# EAGLE board LC Filter (EAGLE 9.6.2)
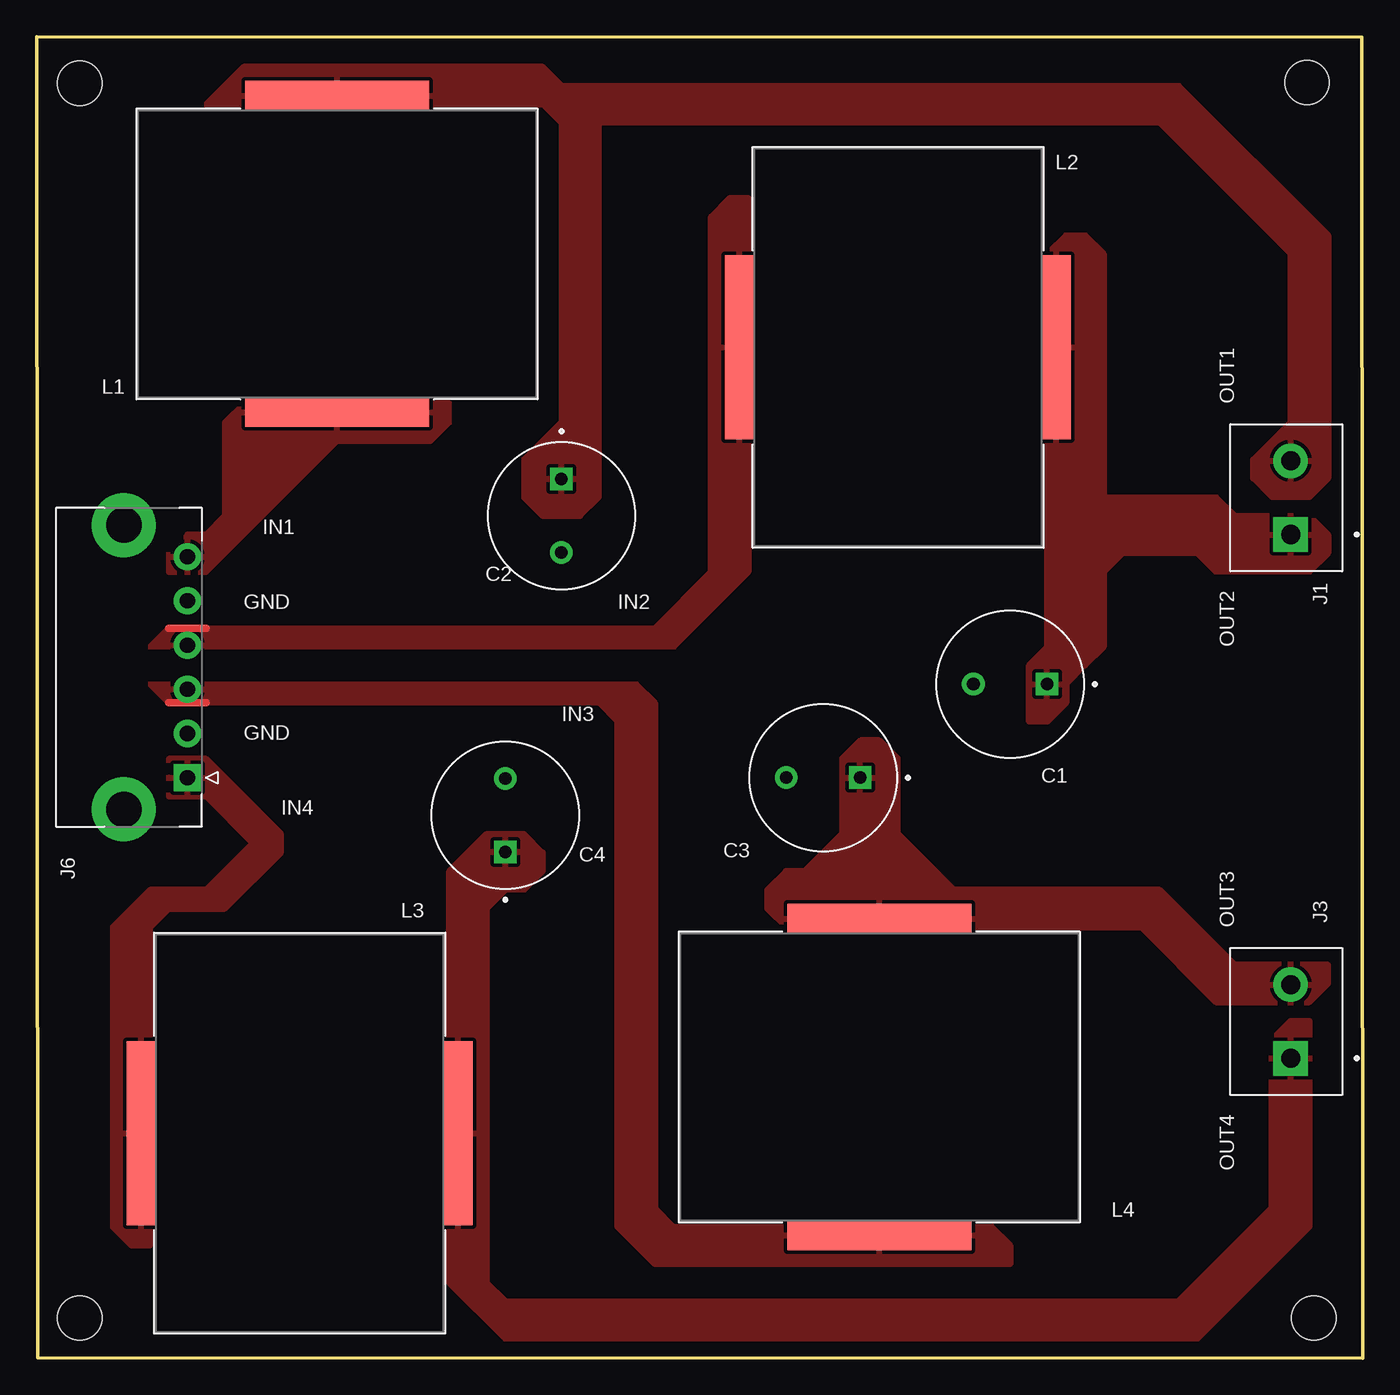
[diagram p0: board, top side]
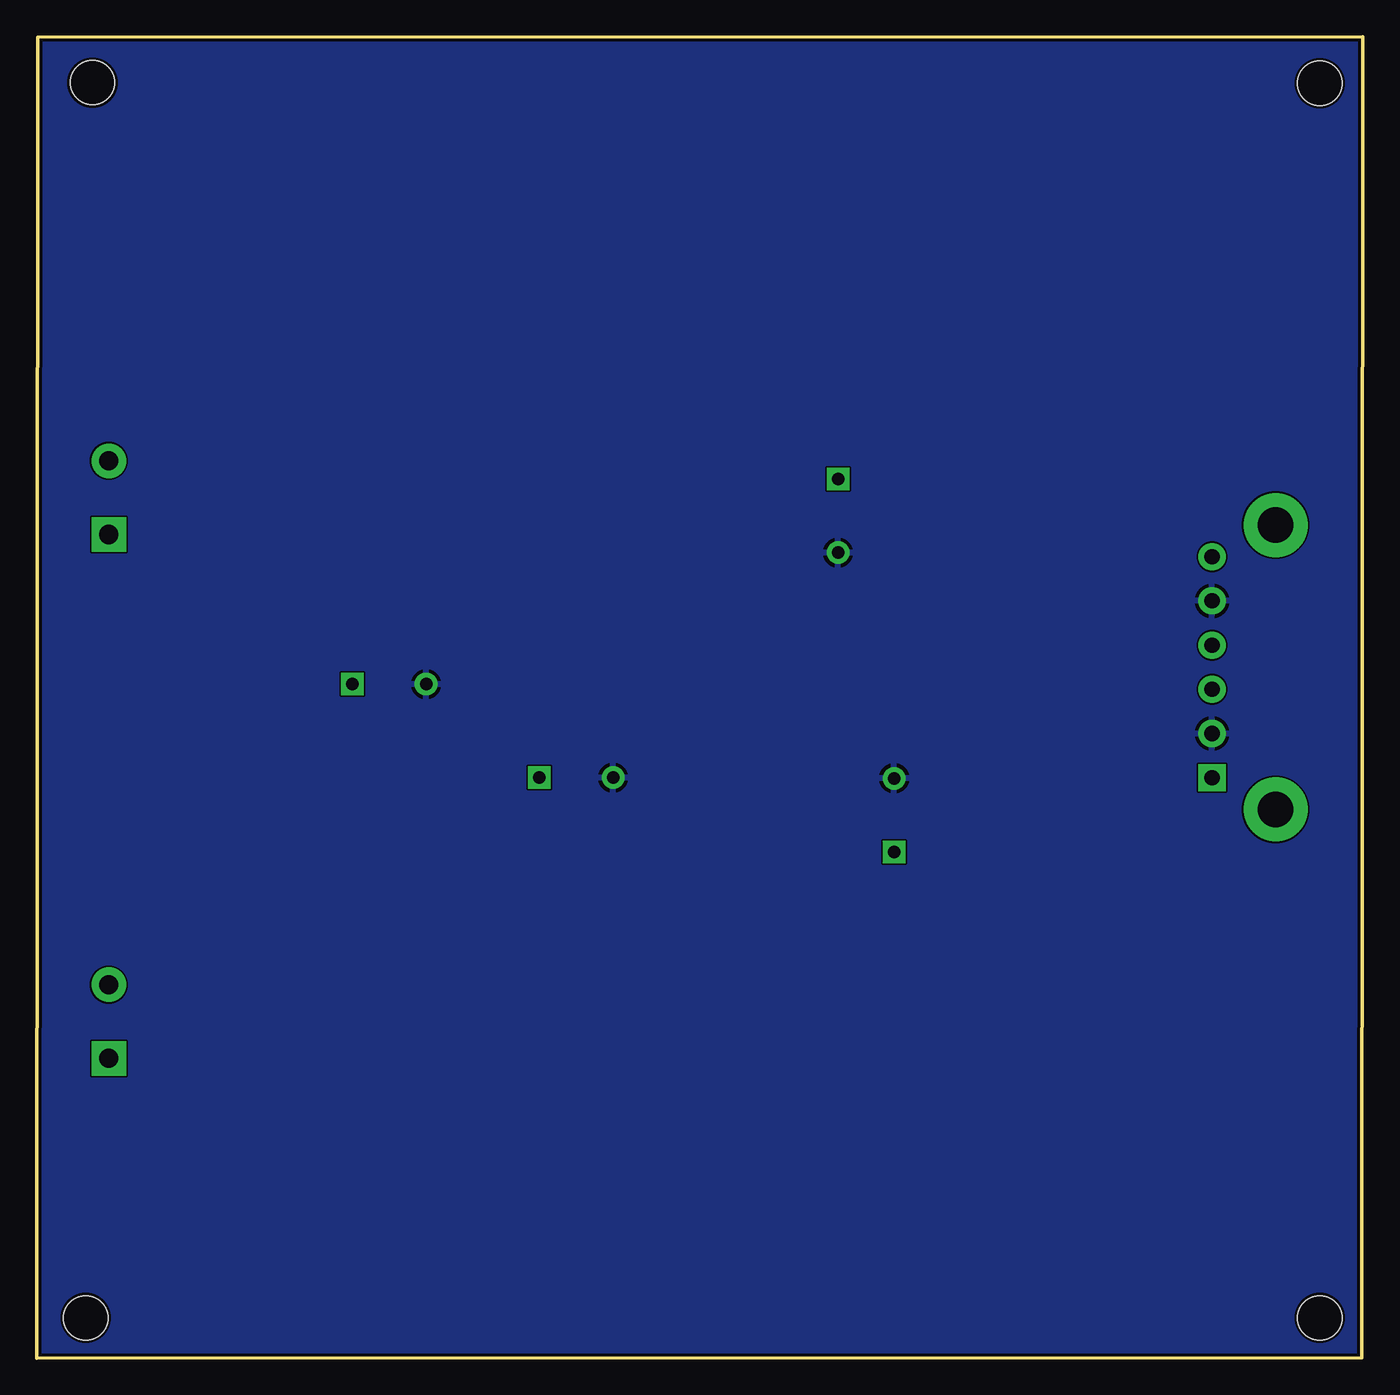
[diagram p1: board, bottom side, seen from below]

Size 90.05 x 89.71 mm. Coordinates in mm from the lower left corner, seen from the top.
Outline: 0,89.71 0.07,0.04 90.05,0 89.98,89.67 0,89.71
Copper layers (1*16): Top 0.035mm / dielectric 1.6mm / Bottom 0.035mm
Design rules "jlcpcb-2layers": minimum track width 5mil, minimum drill 0.3mm, track to track 5mil, track to pad 5mil, pad to pad 5mil, via to via 5mil, smd to smd 5mil, copper to edge 0.2mm, drill to drill 6mil, minimum pad ring 10mil, minimum via ring 3mil, stop-mask expansion 4mil, vias tented up to drill 0mil, thermal gap 10mil
Holes 3 mm at 2.91,86.55 86.27,86.6 2.91,2.73 86.73,2.73

## Footprints (pad centres in the part's own frame; a part is rotated, then mirrored left to right if it is on the bottom)
CAPPRD500W60D1000H1250 = drill 0.85 pad 1.2: N 2.5,0 | drill 0.85 pad 1.2 square: P -2.5,0
CUI_TB002-500-02BE = drill 1.3 square: 1 0,0 | drill 1.3: 2 5,0
MOLEX_436500603 = drill 1.02 pad 1.52 square: 1 0,0 | drill 1.02 pad 1.52: 2 -3,0; 3 -6,0; 4 -9,0; 5 -12,0; 6 -15,0 | drill 2.41 pad 2.91: S1 2.15,-4.32; S2 -17.15,-4.32
6000B_SERIES_MUR = smd 1.994 x 12.497: 1 -10.751,0; 2 10.751,0

## Placement (x,y rotation side)
C1  ECA1EHG471E  [CAPPRD500W60D1000H1250]  66.11,45.76 180 top
C2  ECA1EHG471E  [CAPPRD500W60D1000H1250]  35.63,57.19 270 top
C3  ECA1EHG471E  [CAPPRD500W60D1000H1250]  53.41,39.41 180 top
C4  ECA1EHG471E  [CAPPRD500W60D1000H1250]  31.82,36.87 90 top
J1  TB002-500-02BE  [CUI_TB002-500-02BE]  85.16,55.92 90 top
J3  TB002-500-02BE  [CUI_TB002-500-02BE]  85.16,20.36 90 top
J6  436500603  [MOLEX_436500603]  10.23,39.41 270 top
L1  60B104C  [6000B_SERIES_MUR]  20.39,74.97 90 top
L2  60B104C  [6000B_SERIES_MUR]  58.49,68.62 0 top
L3  60B104C  [6000B_SERIES_MUR]  17.85,15.28 0 top
L4  60B104C  [6000B_SERIES_MUR]  57.22,19.09 90 top

## Library data of the parts
C1-C4 = SnapEDA Library; A_MAX: 12.5; B_MAX: 0.65; B_NOM: 0.6; DESCRIPTION: NHG-A; D_NOM: 10; E_NOM: 5; MF: PANASONIC; PARTREV: 20-DEC-19
J1 J3 = SnapEDA Library; MANUFACTURER: CUI; STANDARD: Manufacturer Recommendations
J6 = SnapEDA Library; MANUFACTURER: Molex; MAXIMUM_PACKAGE_HEIGHT: 5.57 mm; PARTREV: F3; STANDARD: Manufacturer Recommendations
L1-L4 = SnapEDA Library; COPYRIGHT: Copyright (C) 2022 Ultra Librarian. All rights reserved.; MANUFACTURER_PART_NUMBER: 60B104C; MFR_NAME: Murata

## Nets
GND: C1.N C2.N C3.N C4.N J6.2 J6.5
IN1: J6.6 L1.1
IN2: J6.4 L2.1
IN3: J6.3 L4.1
IN4: J6.1 L3.1
OUT1: C2.P J1.2 L1.2
OUT2: C1.P J1.1 L2.2
OUT3: C3.P J3.2 L4.2
OUT4: C4.P J3.1 L3.2

## Tracks (layer width: path | path; a pad name or v marks a point on that pad's centre or on a via)
GND
  pour Bottom: 0.07,89.88 0.07,0.04 89.91,0.04 89.91,89.88
IN1
  pour Top: 8.96,53.38 11.5,53.38 20.39,62.27 26.74,62.27 28.01,63.54 28.01,64.81 14.04,64.81 12.77,63.54 12.77,57.19 11.5,55.92 10.23,55.92 8.96,54.65
IN2
  Top 0.508: J6.4 10.23,49.57 | 10.23,49.57 8.96,49.57 | 10.23,49.57 11.5,49.57
  pour Top: 7.69,48.3 8.96,49.57 41.98,49.57 45.79,53.38 45.79,77.51 47.06,78.78 48.33,78.78 48.33,53.38 43.25,48.3
IN3
  Top 0.508: J6.3 10.23,44.49 | 10.23,44.49 8.96,44.49 | 10.23,44.49 11.5,44.49
  pour Top: 7.69,45.76 40.71,45.76 41.98,44.49 41.98,10.2 43.25,8.93 64.84,8.93 66.11,7.66 66.11,6.39 41.98,6.39 39.44,8.93 39.44,43.22 38.17,44.49 8.96,44.49
IN4
  pour Top: 8.96,40.68 8.96,38.14 11.5,38.14 14.68,34.96 11.5,31.79 7.69,31.79 5.15,29.25 5.15,8.93 6.42,7.66 7.69,7.66 7.69,29.25 8.96,30.52 12.77,30.52 16.58,34.33 16.58,35.6 11.5,40.68
OUT1
  pour Top: 11.5,85.13 34.36,85.13 35.63,83.86 35.63,63.54 33.09,61 33.09,58.46 34.36,57.19 36.9,57.19 38.17,58.46 38.17,83.86 34.36,87.67 14.04,87.67
  pour Top: 33.09,86.4 77.54,86.4 87.7,76.24 87.7,59.73 86.43,58.46 83.89,58.46 82.62,59.73 82.62,61 85.16,63.54 85.16,74.97 76.27,83.86 35.63,83.86
OUT2
  pour Top: 67.38,45.76 67.38,47.03 68.65,48.3 68.65,74.97 69.92,76.24 71.19,76.24 72.46,74.97 72.46,59.73 72.46,58.46 80.08,58.46 81.35,57.19 82.62,57.19 86.43,57.19 87.7,55.92 87.7,54.65 86.43,53.38 85.16,53.38 80.08,53.38 78.81,54.65 73.73,54.65 72.46,53.38 72.46,49.57 72.46,48.3 71.19,47.03 69.92,45.76 69.92,44.49 68.65,43.22 67.38,43.22
OUT3
  pour Top: 50.87,29.25 75,29.25 80.08,24.17 86.43,24.17 87.7,25.44 87.7,26.71 81.35,26.71 76.27,31.79 62.3,31.79 58.49,35.6 58.49,40.68 57.22,41.95 55.95,41.95 54.68,40.68 54.68,35.6 52.14,33.06 50.87,33.06 49.6,31.79 49.6,30.52
OUT4
  pour Top: 28.01,21.63 29.28,21.63 30.55,20.36 30.55,5.12 31.82,3.85 77.54,3.85 83.89,10.2 83.89,21.63 85.16,22.9 86.43,22.9 86.43,8.93 78.81,1.31 31.82,1.31 28.01,5.12
  pour Top: 28.01,21.63 28.01,33.06 30.55,35.6 33.09,35.6 34.36,34.33 34.36,33.06 33.09,31.79 31.82,31.79 30.55,30.52 30.55,20.36 29.28,21.63

## Text on the board
tNames: OUT1 | IN1 | GND | IN2 | OUT2 | IN3 | GND | IN4 | OUT3 | OUT4